# Altium PCB PCB1.PcbDoc
Units mm, origin at the board's own origin, x right, y up, seen from the top; angles counter-clockwise.
Board outline 85.72 x 69.59 mm, 2 copper layers (Top Layer, Bottom Layer); 30 components, 32 nets, 149 pads, 28 vias.
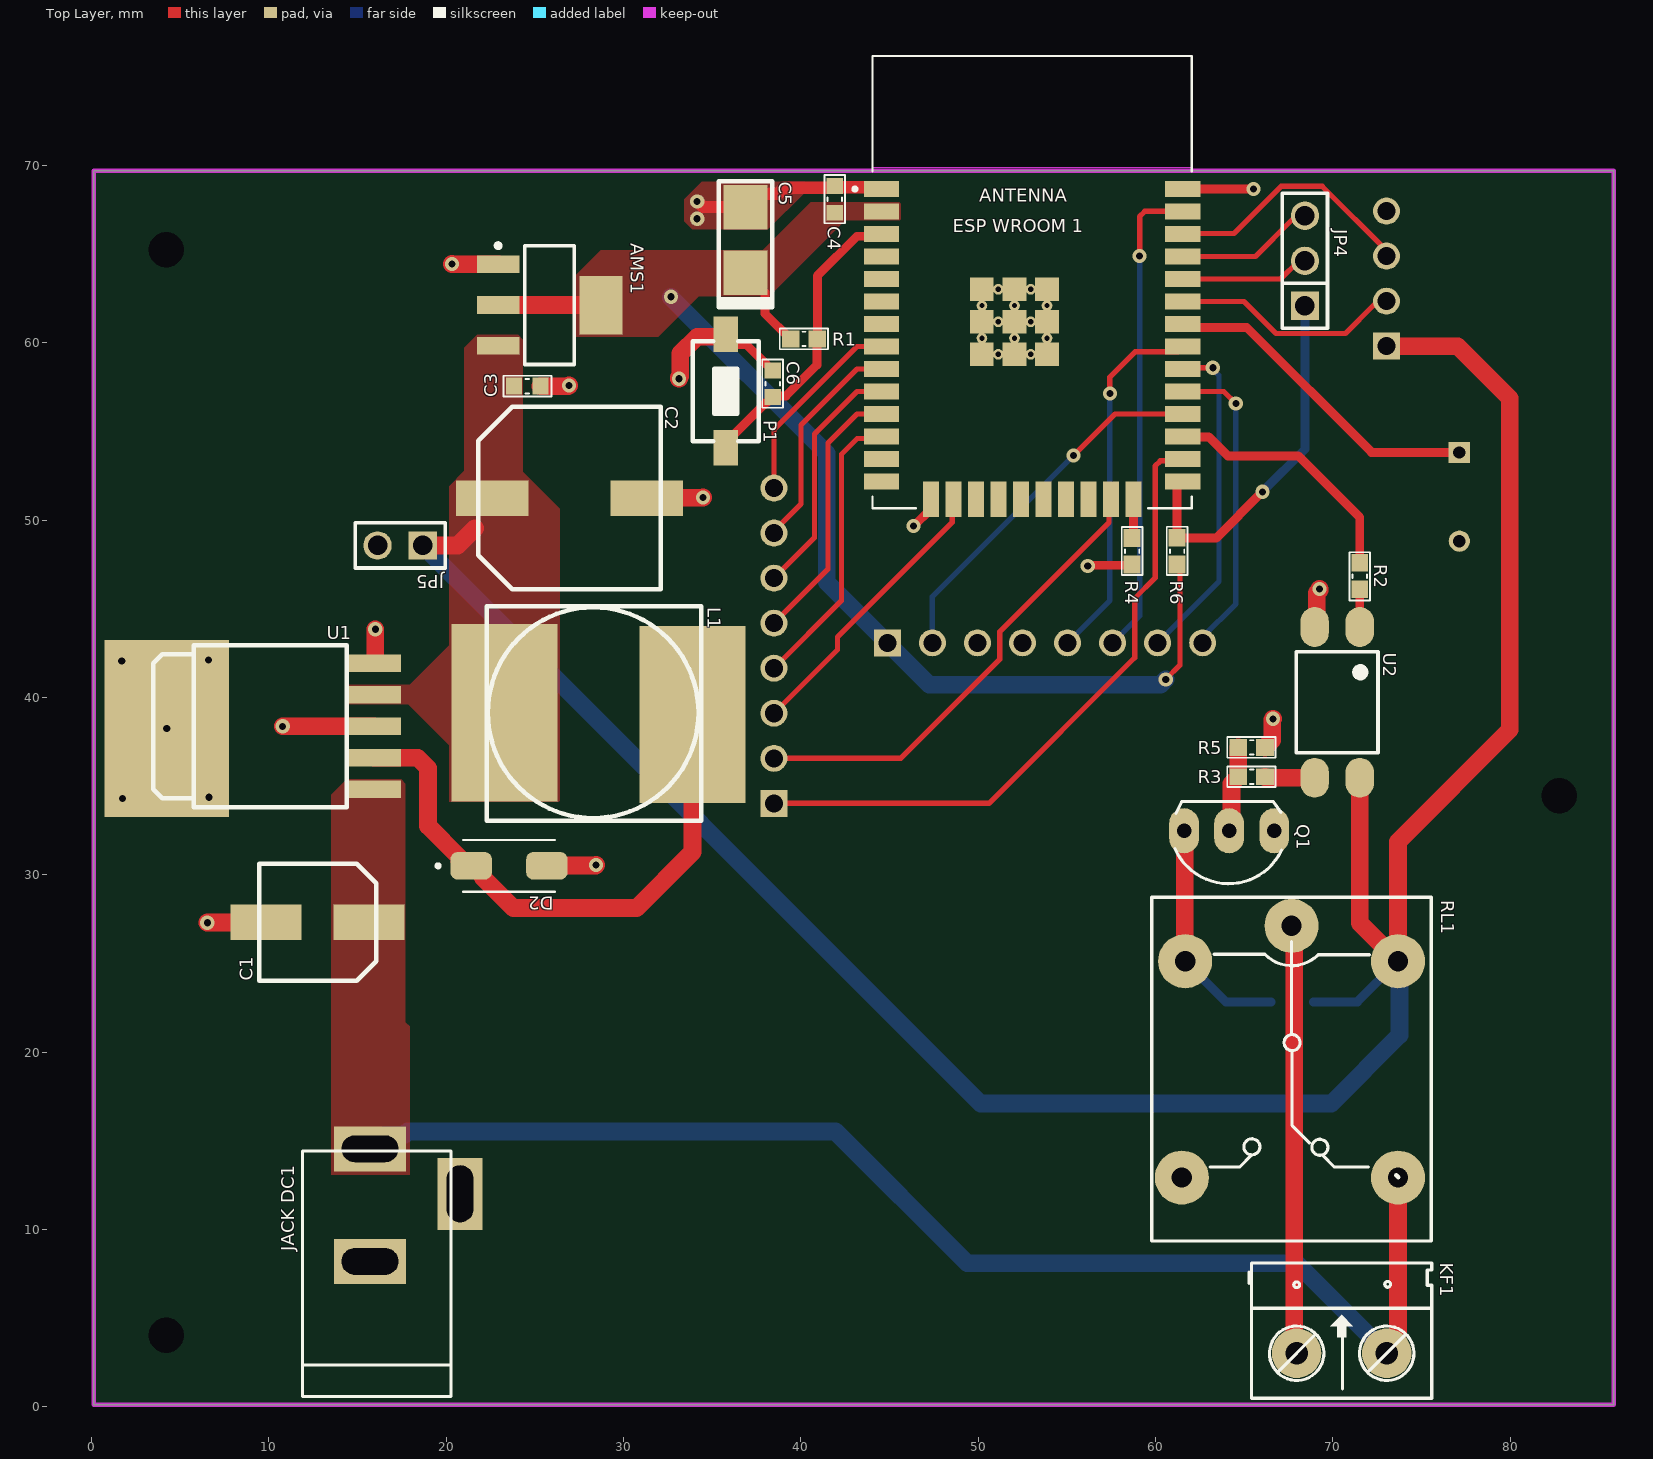
[diagram p0: Top Layer view]
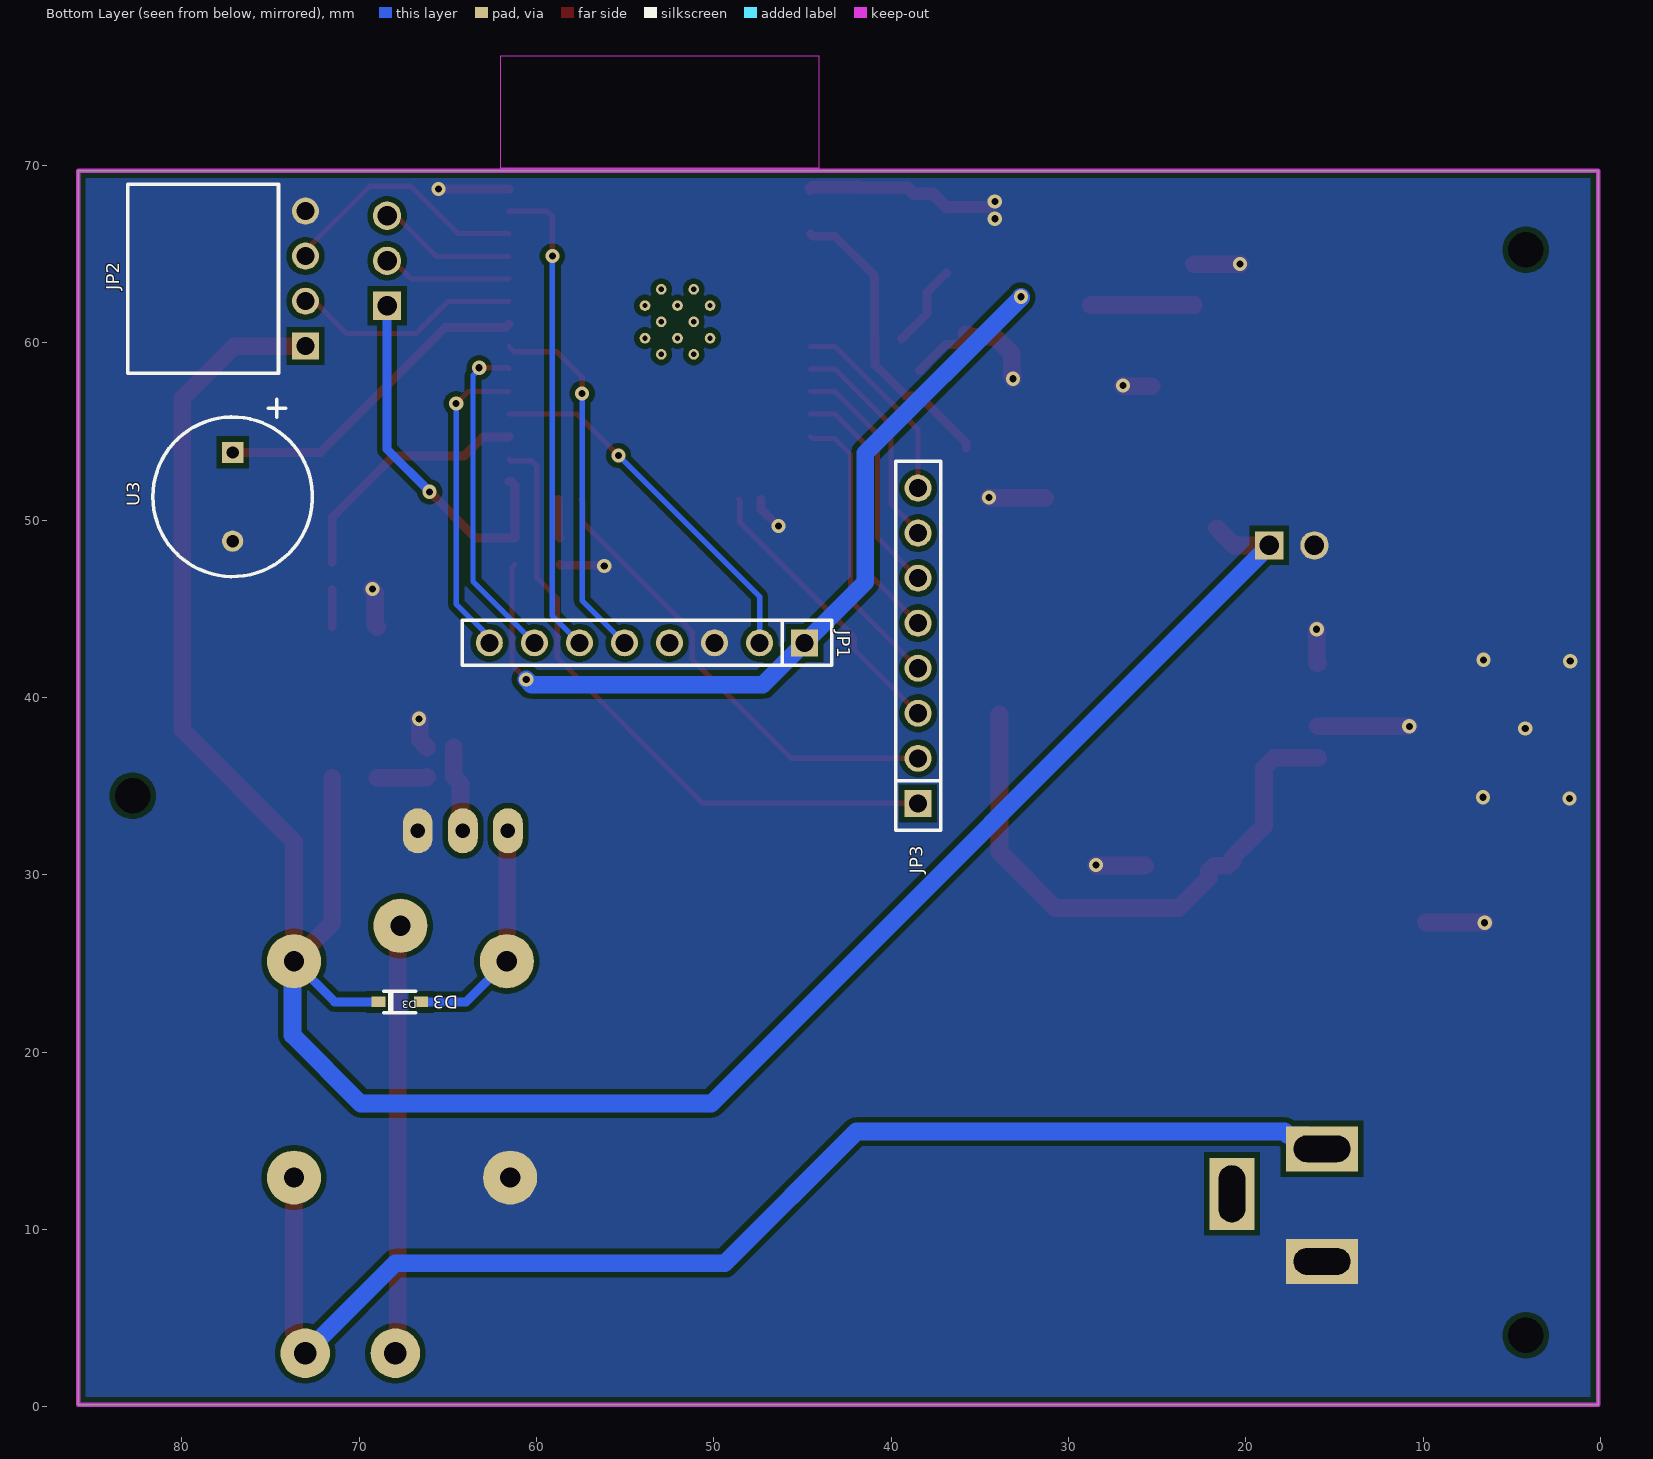
[diagram p1: Bottom Layer view, seen from below]
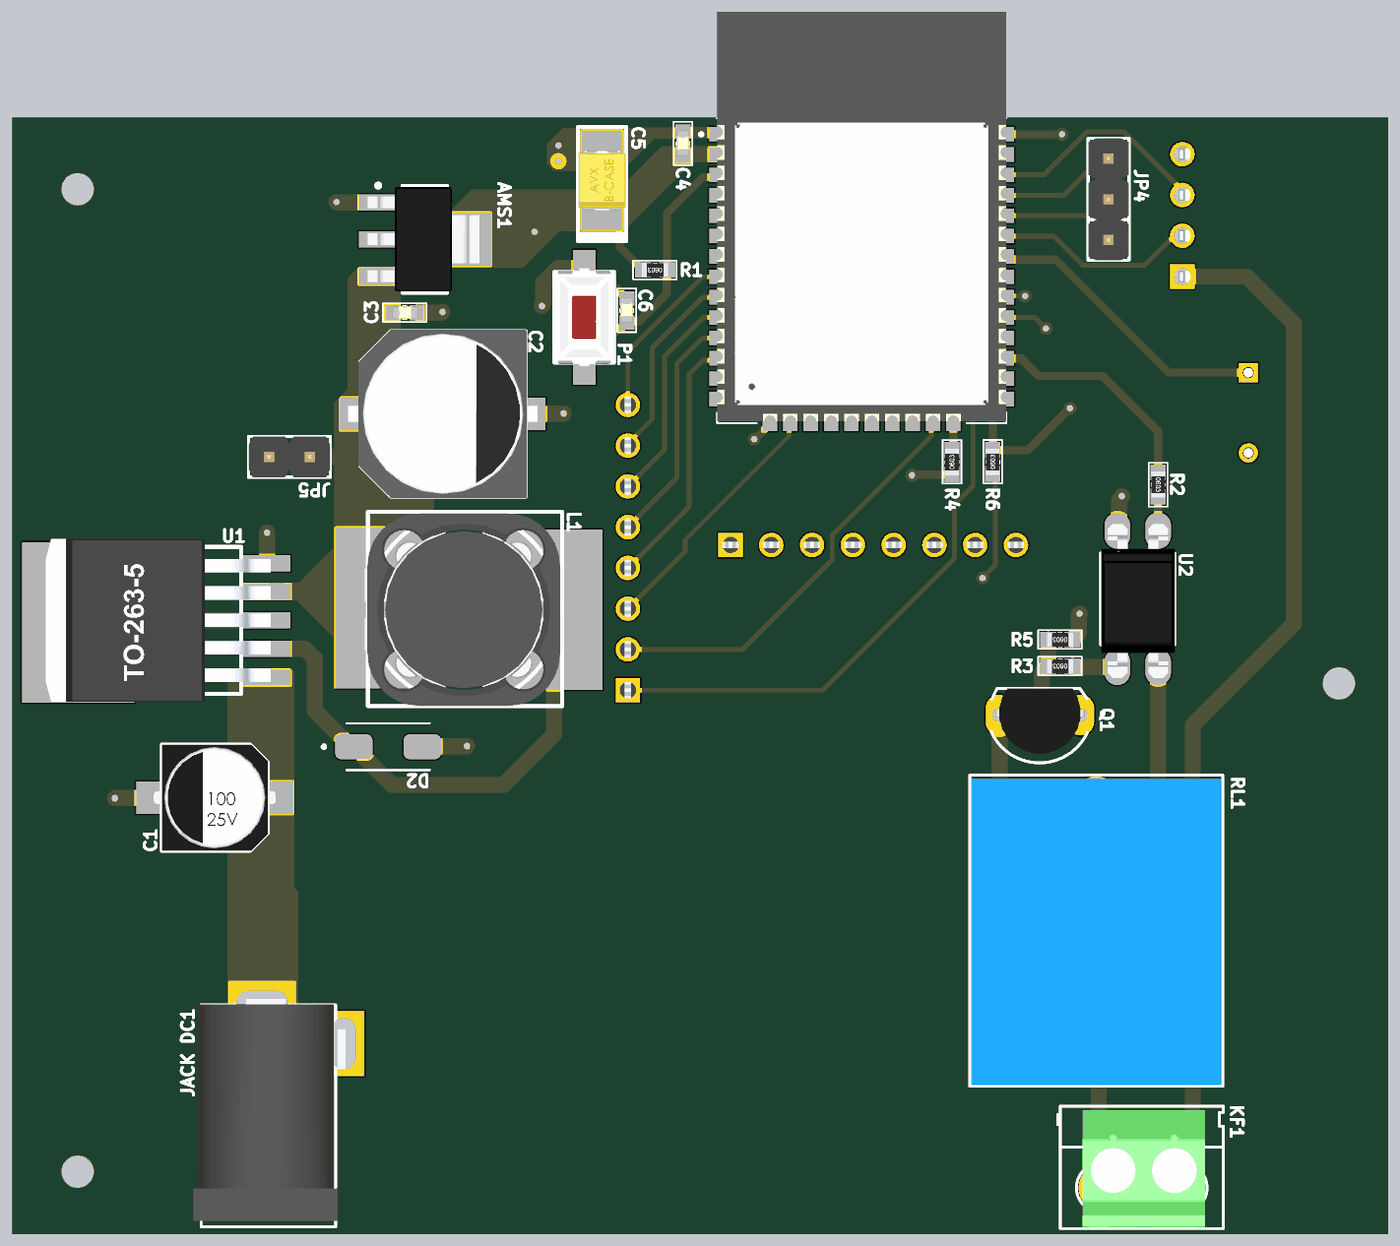
[diagram p2: 3D render of the assembled board from above, using the file's embedded part models]
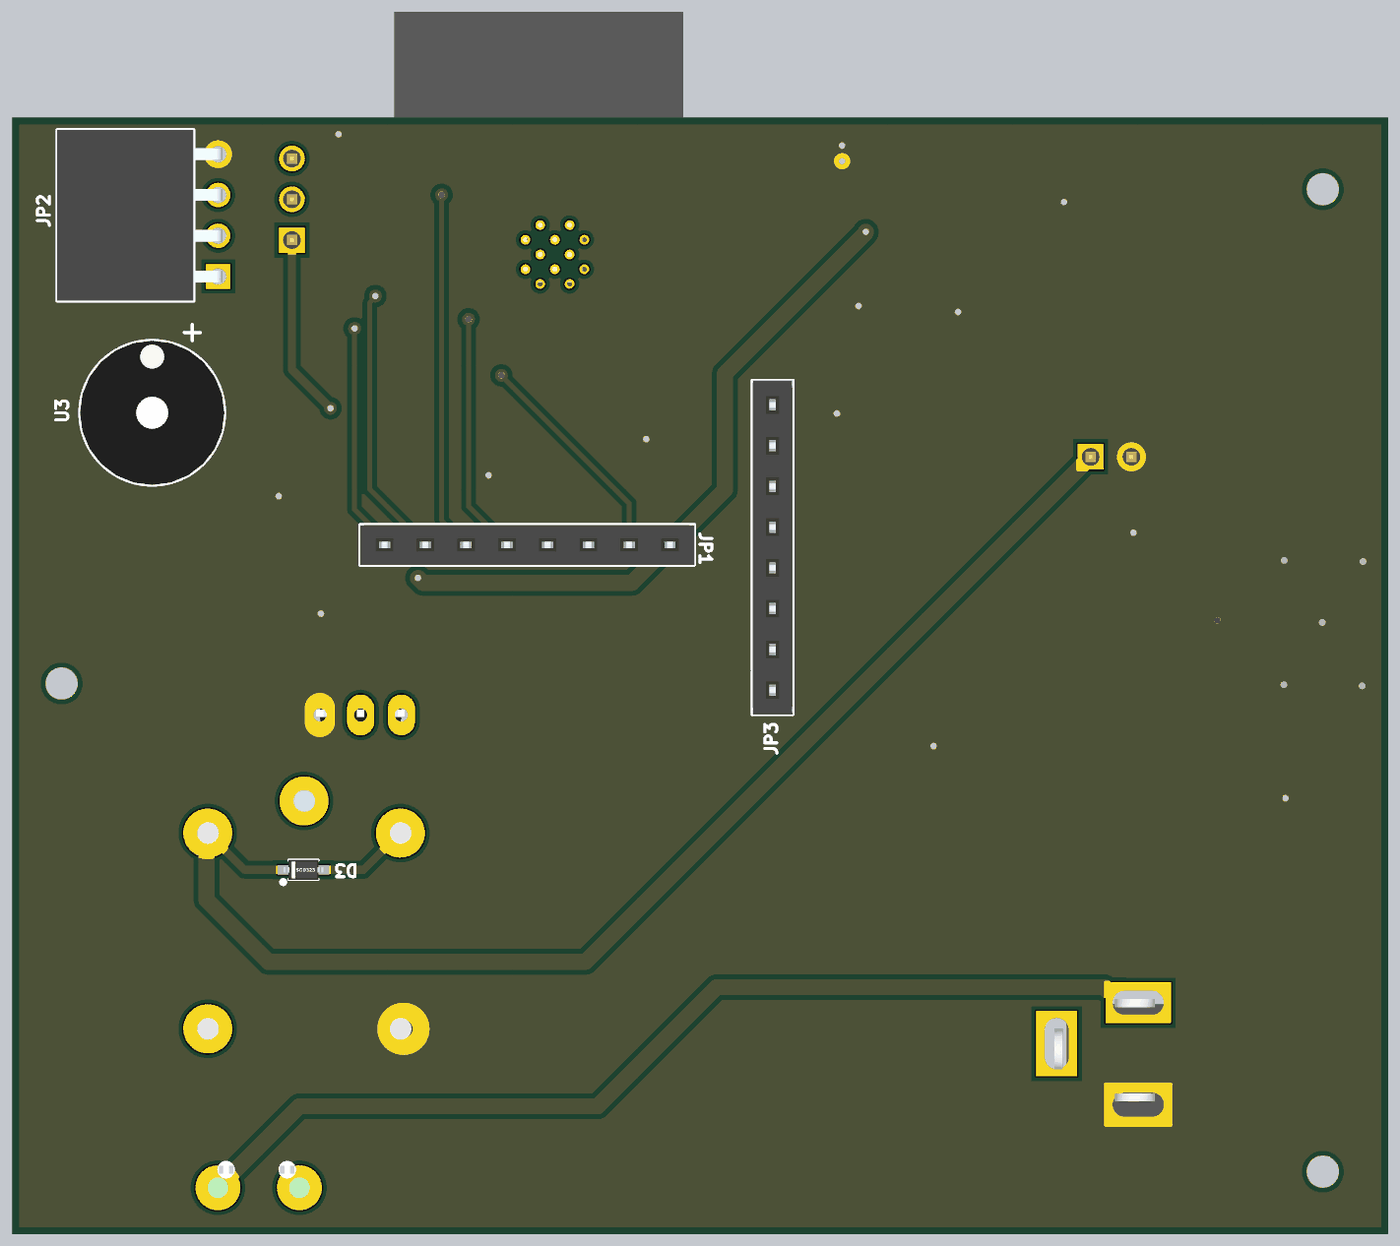
[diagram p3: 3D render of the assembled board from below, using the file's embedded part models]

## Layer stack, top to bottom
Top Solder: solder mask 0.0102, Solder Resist, Dk 3.5
Top Layer: signal copper 0.0356
Dielectric 1: dielectric 0.32, FR-4, Dk 4.8
Bottom Layer: signal copper 0.0356
Bottom Solder: solder mask 0.0102, Solder Resist, Dk 3.5

## Board outline
0.127,0.127 0.127,69.721 33.528,69.721 85.852,69.721 85.852,0.127

## Design rules (kind name [scope] priority, off if disabled: settings)
Clearance [All] p1: gap=0.3 ignorepadtopadclearanceinfootprint=FALSE
HoleSize [All] p1: absolutevalues=TRUE maxlimit=5 minlimit=0.3 maxpercent=80.000 minpercent=20.000
HoleToHoleClearance [All] p1: gap=0.15 allowstackedmicrovias=TRUE
MinimumSolderMaskSliver [All] p1: minsoldermaskwidth=0.1
PolygonConnect [All] p1: connectstyle=Direct reliefconductorwidth=0.254 reliefentries=4 polygonreliefangle="90 Angle" airgapwidth=0.254
RoutingVias [All] p1: holewidth=0.4 width=0.8 viastyle="Through Hole" minholewidth=0.3 minwidth=0.6 maxholewidth=0.6 maxwidth=1
SilkToSilkClearance [All] p1: silktosilkclearance=0
SilkToSolderMaskClearance [IsPad] p1: minsilkscreentomaskgap=0 clearancetoexposedcopper=TRUE
SolderMaskExpansion [All] p1: expansion=0.102 istentingtop=FALSE
UnRoutedNet [All] p1: checkbadconnections=TRUE
Width [All] p1: maxlimit=1 minlimit=0.3 preferedwidth=0.5
24 further rules are at their usual default settings.

## Components (designator, comment, footprint, x,y, rotation, side; value= is the part's Value field where it differs from the comment)
AMS1 "AMS1117-3.3V" SOT223 25.827,62.133 r270 top value="AMS1117-3.3V SOT223"
C1 "100uF" "tu nhom 6.3 (d)" 12.746,27.335 r180 top
C2 "680uF" "tu nhom 10 (G)" 26.952,51.252 r0 top
C3 "10uF" "Cap 0603" 24.576,57.569 r0 top
C4 "22uF" "Cap 0603" 41.902,68.102 r90 top
C5 "100uF" "tu tantalum smd3528" 36.877,65.802 r90 top
C6 "100uF" "Cap 0603" 38.402,57.702 r90 top
D2 "B340A-13-F" DIOM5226X240N 23.541,30.51 r0 top
D3 "1N4148" SOD-323 67.705,22.836 r0 bottom
"ESP WROOM 1" "ESP32 WROOM 32" ESP32-WROOM-32D 53.046,63.427 r0 top
"JACK DC1" "JACK DC 5.5" "JACK DC 5.5" 18.242,11.377 r90 top value="Jac DC"
JP1 "JP 1x8 2.54" "JP 1x8 CT" 44.877,43.083 r0 bottom
JP2 "JP 1x4 2.54" "JP 1x4 CC" 73.025,63.625 r90 bottom
JP3 "JP 1x8 2.54" "JP 1x8 CT" 38.481,34.034 r90 bottom
JP4 "JP 1x3 2.54" "JP 1x3 DT" 68.427,62.087 r90 top
JP5 "JP 1x2 2.54" "JP 1x2 DT" 18.667,48.577 r180 top
KF1 "CON 2 KF301" "Con 2 KF301 5.08" 67.959,3.024 r0 top
L1 "150uH - 3A SMD" "Cuon Cam 12x12x10" 22.287,45.146 r270 top
P1 "=value" "SW 2P SMD" 35.814,57.275 r270 top
Q1 "2N3904" TO92 64.149,32.488 r180 top value=C9014
R1 "1k" "tro smd 0603" 40.178,60.228 r180 top
R2 "1k" "tro smd 0603" 71.515,46.851 r270 top
R3 "1k" "tro smd 0603" 65.419,35.536 r180 top
R4 "10k" "tro smd 0603" 58.677,48.252 r90 top
R5 "10k" "tro smd 0603" 65.419,37.187 r180 top
R6 "10k" "tro smd 0603" 61.214,48.258 r90 top
RL1 "Relay" "Relay 5 Chan SRD" 67.674,27.13 r270 top
U1 "LM2576HVS 5.0V SMD" TO263-5 10.079,38.384 r90 top
U2 "OPTO PC817 SMD" SOP4 70.245,39.727 r270 top value=PC817
U3 "BUZZ" BUZZER_D9_TH 77.135,50.322 r270 bottom

## Footprints (in the part's own frame and the unit in brackets; to place one, negate y for a bottom-side part, rotate by r counter-clockwise, add the part's x,y. Pads: shape width x height; smd on the part's side, far side on the other; paste and mask are expansions set on the pad)
BUZZER_D9_TH [mm]
  rect 1.2x1.2 hole 0.7: 1(-3.5,0)
  round 1.2 hole 0.7: 2(1.5,0)
  silkscreen extent -6.5,-4.5 3.5,4.5, body extent -5.5,-4.5 3.5,4.5, height 5.5
"Cap 0603" [mm]
  rect 0.889x0.95 smd mask+0.076: 1(-0.758,-0.008) 2(0.742,-0.008)
  silkscreen extent -1.35,-0.59 1.36,0.58, body extent -0.77,-0.41 0.83,0.39, height 0.78
"Con 2 KF301 5.08" [mil]
  round 110 hole 50: 1(0,0) 2(200,0)
  silkscreen extent -106,-100 300,200, body extent -45,-97 255,190, height 335
"Cuon Cam 12x12x10" [mm] "Cuon Cam 12x12x10"
  rect 10x6 smd: 1(6.1,11.6) 2(6,1)
  silkscreen extent 0,0 12.1,12.1, body extent 0.1,-0.2 12.1,12.14, height 7.51
DIOM5226X240N [mm]
  rrect50% 2.33x1.55 smd: A(2.135,0) C(-2.135,0)
  silkscreen extent -4.1,-1.46 2.6,1.46
ESP32-WROOM-32D [mm]
  rect 2x0.9 smd: 1(-8.5,5.26) 2(-8.5,3.99) 3(-8.5,2.72) 4(-8.5,1.45) 5(-8.5,0.18) 6(-8.5,-1.09) 7(-8.5,-2.36) 8(-8.5,-3.63) 9(-8.5,-4.9) 10(-8.5,-6.17) 11(-8.5,-7.44) 12(-8.5,-8.71) 13(-8.5,-9.98) 14(-8.5,-11.25) 25(8.5,-11.25) 26(8.5,-9.98) 27(8.5,-8.71) 28(8.5,-7.44) 29(8.5,-6.17) 30(8.5,-4.9) 31(8.5,-3.63) 32(8.5,-2.36) 33(8.5,-1.09) 34(8.5,0.18) 35(8.5,1.45) 36(8.5,2.72) 37(8.5,3.99) 38(8.5,5.26)
  rect 0.9x2 smd: 15(-5.715,-12.25) 16(-4.445,-12.25) 17(-3.175,-12.25) 18(-1.905,-12.25) 19(-0.635,-12.25) 20(0.635,-12.25) 21(1.905,-12.25) 22(3.175,-12.25) 23(4.445,-12.25) 24(5.715,-12.25)
  rect 1.33x1.33 smd: 39(-2.835,-4.075) 39(-2.835,-2.24) 39(-2.835,-0.405) 39(-1,-4.075) 39(-1,-2.24) 39(-1,-0.405) 39(0.835,-4.075) 39(0.835,-2.24) 39(0.835,-0.405)
  round 0.6 hole 0.3: 39(-2.835,-3.157) 39(-2.835,-1.322) 39(-1.917,-4.075) 39(-1.917,-2.24) 39(-1.917,-0.405) 39(-1,-3.157) 39(-1,-1.322) 39(-0.082,-4.075) 39(-0.082,-2.24) 39(-0.082,-0.405) 39(0.835,-3.157) 39(0.835,-1.322)
  Keep-Out Layer region: 9,6.45 -9,6.45 -9,12.75 9,12.75
  Keep-Out Layer region: 9,6.45 -9,6.45 -9,12.75 9,12.75
  silkscreen extent -10.1,-12.75 9,12.75, body extent -9,-12.62 9,12.88, height 3.2
"JACK DC 5.5" [mm] "Jac DC input"
  rect 2.54x4.064 hole 1.5 slot 3.2 at 90 deg: 1(3.175,2.54) 2(-3.175,2.54)
  rect 4.064x2.54 hole 1.5 slot 3.2 at 0 deg: 3(0.635,-2.54)
  silkscreen extent -10.79,-2.03 3.05,6.35, body extent -10.42,-2.67 3.4,6.84, height 11.02
"JP 1x2 DT" [mm] "2 pins, 1 row, straight, gold plating"
  rect 1.6x1.6 hole 1.1: 1(0,0)
  round 1.6 hole 1.1: 2(2.54,0)
  silkscreen extent -1.27,-1.27 3.81,1.27, body extent -1.27,-1.27 3.81,1.27, height 8.54
"JP 1x3 DT" [mm]
  rect 1.6x1.6 hole 1.1: 1(0,0)
  round 1.6 hole 1.1: 2(2.54,0) 3(5.08,0)
  silkscreen extent -1.27,-1.27 6.35,1.27, body extent -1.27,-1.27 6.35,1.27, height 8.54
"JP 1x4 CC" [mm]
  rect 1.52x1.52 hole 1.02: 1(-3.81,0)
  round 1.52 hole 1.02: 2(-1.27,0) 3(1.27,0) 4(3.81,0)
  silkscreen extent -5.33,1.52 5.33,10.03, body extent -5.33,-0.25 5.33,10.05, height 2.51
"JP 1x8 CT" [mm] "8 row, straight, gold plating"
  rect 1.52x1.52 hole 1.02: 1(0,0)
  round 1.52 hole 1.02: 2(2.54,0) 3(5.08,0) 4(7.62,0) 5(10.16,0) 6(12.7,0) 7(15.24,0) 8(17.78,0)
  silkscreen extent -1.52,-1.27 19.3,1.27, body extent -1.52,-1.25 19.3,1.25, height 8.51
"Relay 5 Chan SRD" [mil] "Relay SPDT, 5 pin, 10A,W 650mil, L 800mil, H 800mil"
  round 120 hole 45: 1(0,0) 2(559.06,236.22) 3(559.06,-243.78) 4(78.74,-236.22) 5(78.74,236.22)
  silkscreen extent -63,-311 700,310, body extent -55,-306 697,304, height 602
SOD-323 [mm] "diode"
  rect 0.8x0.6 smd: 1(-1.2,0) 2(1.2,0)
  round 0.5 on Bottom Overlay: 2(1.27,0.762)
  silkscreen extent -0.9,-0.6 0.9,0.6, body extent -1.25,-0.63 1.25,0.62, height 0.99
SOP4 [mm]
  oval 2.25x1.6 smd: 1(-4.25,1.27) 2(-4.25,-1.27) 3(4.25,-1.27) 4(4.25,1.27)
  silkscreen extent -2.85,-2.3 2.85,2.3, body extent -4.67,-2.29 4.93,2.31, height 3.6
SOT223 [mm]
  rect 1x2.4 smd: 1(-2.3,-2.9) 2(0,-2.9) 3(2.3,-2.9)
  rect 3.3x2.4 smd: 4(0,2.9)
  silkscreen extent -3.47,-3.02 3.35,1.4, body extent -3.25,-3.56 3.25,3.4, height 1.68
"SW 2P SMD" [mm]
  rect 2x1.4 smd: 1(-3.2,-0.051) 2(3.2,-0.051)
  silkscreen extent -2.82,-1.91 2.82,1.8, body extent -3.05,-1.9 3.05,1.8, height 2.5
TO92 [mil] "TO-92"
  oval 66x100 hole 32: 1(-100,0) 2(0,0) 3(100,0)
  silkscreen extent -117,-65 120,118, body extent -109,-66 109,95, height 245
TO263-5 [mil] "TO263-5"
  rect 39.37x120 smd: 1(-140,-230) 2(-70,-230) 3(0,-230) 4(70,-230) 5(140,-230)
  rect 393.7x275.59 smd: 6(-5,230)
  silkscreen extent -180,-170 180,260, body extent -200,-242 200,310, height 180
"tro smd 0603" [mm] "Chip Capacitor, 2-Leads, Body 1,60x0,80mm, IPC Medium Density"
  rect 1x0.95 smd mask+0.076: 1(-0.75,0) 2(0.75,0)
  silkscreen extent -1.35,-0.58 1.37,0.58, body extent -0.82,-0.42 0.82,0.43, height 0.44
"tu nhom 6.3 (d)" [mm]
  rect 4x2 smd: 1(-2.9,0) 2(2.9,0)
  silkscreen extent -3.3,-3.3 3.3,3.3, body extent -3.8,-3.3 3.8,3.3, height 8
"tu nhom 10 (G)" [mm]
  rect 4.1x2 smd: 1(-4.35,0) 2(4.35,0)
  silkscreen extent -5.15,-5.15 5.15,5.15, body extent -5.9,-5.25 5.9,5.25, height 10.5
"tu tantalum smd3528" [mm]
  rect 2.5x2.5 smd: 1(-1.85,0) 2(1.85,0)
  silkscreen extent -3.78,-1.5 3.33,1.5, body extent -1.85,-1.46 1.85,1.47, height 2.03

## Part data
AMS1: library part "AMS1117 SMD", "Dán", Chung_Loai=Dán, Don_Vi=Con, Ma_Hang=MH000596
C1: library part "Tu Nhom 100uF 25V", "Dán", Chung_Loai=Dán, Don_Vi=Con, Ma_Hang=MH002222, So_Chan=2, Ten_Linh_Kien="Tụ Nhôm 100uF 25V 6x7MM"
C2: library part "Tu Nhom 680uF 16V", "Dán", Chung_Loai=Dán, Don_Vi=Con, Ma_Hang=MH007513, So_Chan=2, Ten_Linh_Kien="Tụ Nhôm 680uF 16V 10x10.5MM"
C3 C4 C6: library part "Cap 0603", "Capacitor SMD 0603"
C5: library part "Tu tantalum 100uF 6.3V SMD3528", "Dán", Chung_Loai=Dán, Don_Vi=Con, Ma_Hang=MH007595, So_Chan=2, Ten_Linh_Kien="Tụ tantalum 107J-100uF 6.3V SMD3528"
D2: "Diode Schottky 40V 3A Surface Mount SMA", Package="DO-214 Diodes Inc.", Availability=Unavailable, MF="Diodes Inc.", MP=B340A-13-F, Price=None, SnapEDA_Link=https://www.snapeda.com/parts/B340A-13-F/Diodes%20Inc./view-part/78704/?ref=snap
D3: library part "DIODE GEN PURP 75V 150MA DO35", "DIODE GEN PURP 75V 150MA DO35"
JP1 JP3: library part "JP 1x8 2.54 Cai Thang", "Cắm", Chung_Loai=Cắm, Don_Vi=Con, Ma_Hang=MH004006, Ten_Linh_Kien="Jump Đơn Cái 2.54MM 1x20P Thẳng"
JP2: library part "JP 1x4 2.54 Cai Cong", "Cắm", Chung_Loai=Cắm, Don_Vi=Con, Ma_Hang=MH001265, Ten_Linh_Kien="Jump Đơn Cái 2.54MM 1x40P Cong"
JP4: library part "JP 1x3 2.54 Duc Thang", "Cắm", Chung_Loai=Cắm, Don_Vi=Con, Ma_Hang=MH000903, Ten_Linh_Kien="Jump Đơn Đực 2.54MM 1x40P Thẳng 11MM"
JP5: library part "JP 1x2 2.54 Duc Thang", "Cắm", Chung_Loai=Cắm, Don_Vi=Con, Ma_Hang=MH000903, Ten_Linh_Kien="Jump Đơn Đực 2.54MM 1x40P Thẳng 11MM"
KF1: "Cắm", Chung_Loai=Cắm, Don_Vi=Con, Ma_Hang=MH000987, Ten_Linh_Kien="CON 2 KF301-2P 5.08MM Xanh Dương"
L1: library part "CUON CAM 100uH SMD", "Dán", Chung_Loai=Dán, Don_Vi=Con, Ten_Linh_Kien="Cuộn Cảm 100uH 7x7x4MM CD74"
P1: library part "Button 2 SMD", "SMD Mini Push Button Switch 2 Pin 3x6x2.7mm", MPN="SMD Mini Push Button 2 SMD", Link=https://ram-e-shop.com/product/press2pin-smd/
Q1: library part "Trans 2N3904", "NPN transistor EBC"
R1 R2 R3: library part "Tro 0603 1% 1k", "Dán", Chung_Loai=Dán, Don_Vi=Con, Ma_Hang=MH006334, So_Chan=2, Ten_Linh_Kien="Trở 0603 1% 1k"
R4 R5 R6: library part "Tro 0603 1% 10k", "Dán", Chung_Loai=Dán, Don_Vi=Con, Ma_Hang=MH006333, So_Chan=2, Ten_Linh_Kien="Trở 0603 1% 10k"
RL1: library part "Relay 5 Chan SRD", "Relay 5 Chan", Ma_Hang=MH009374, Ten="Relay 5V10A SRD-05VDC-SL-C Chính Hãng"
U1: "Dán", Chung_Loai=Dán, Don_Vi=Con, Ma_Hang=MH002362, Ten_Linh_Kien="LM2576HVS-5.0V BUCK 5V 3A TO263-5"
U2: "Single Opto"
U3: library part Speaker, "Loudspeaker"

## Free pads (board coordinates)
  round 1.524 hole 2: 2(82.777,34.452) 3(4.202,65.252) 4(4.202,4.027)

## Via types
v1: diameter 0.8, hole 0.4, Top Layer to Bottom Layer, tented both sides, 27 vias
v2: diameter 0.8, hole 0.4, Top Layer to Bottom Layer, 1 vias

## Nets (pads, with @x,y where several pads share a name; then routed paths per layer and width w, separated by ;. In a path a pad name is that pad's centre, name@x,y a point inside that pad or via, vN(x,y) a via of type N, cw(c..) or ccw(c..) an arc to the next point about the centre after c; other vN are vias at no path point)
+3.3V: "ESP WROOM 1.2" AMS1.2 AMS1.4 C4.1 C5.1 JP1.1 R1.2 R6.1 | length 58.8
  Top Layer w0.3: v1(60.577,41.027) 60.577,41.03 61.377,41.83 61.377,47.345 R6.1
  Top Layer w0.5: C5.1 37.977,62.852 37.977,61.654 39.403,60.228 R1.2
  Top Layer w1: AMS1.2 AMS1.4
  Bottom Layer w1: v1(32.677,62.602) 32.677,62.552 41.452,53.777 41.452,46.508 JP1.1 47.233,40.727 60.277,40.727 v1(60.577,41.027)
+5V: AMS1.3 C2.1 C3.1 D3.2@68.905,22.836 JP2.1 JP5.1 L1.2 RL1.5 U1.4 U2.4 | length 136.8
  Top Layer w1: JP5.1 20.652,48.577 21.627,49.552 ; U2.4 71.515,27.289 RL1.5 73.674,31.874 79.977,38.177 79.977,56.877 77.039,59.815 JP2.1
  Bottom Layer w0.5: D3.2@68.905,22.836 71.38,22.836 RL1.5
  Bottom Layer w1: JP5.1 50.142,17.102 69.902,17.102 73.752,20.952 73.752,25.052 RL1.5
+12V: "JACK DC1.1" C1.1 KF1.2 RL1.2 U1.1 | length 73.1
  Top Layer w1: KF1.2 73.039,3.509 73.674,4.144 RL1.2
  Bottom Layer w1: 15.702,14.552 16.472,15.322 17.615,15.322 17.82,15.527 41.952,15.527 49.377,8.102 67.961,8.102 KF1.2
BUZZER: "ESP WROOM 1.32" U3.1 | length 18.6
  Top Layer w0.5: 61.546,61.067 61.746,60.867 65.137,60.867 72.182,53.822 U3.1
COL1: "ESP WROOM 1.12" JP3.4 | length 16.3
  Top Layer w0.3: JP3.4 42.291,45.464 42.291,53.719 43.18,54.608 44.437,54.608 44.546,54.717
COL2: "ESP WROOM 1.16" JP3.3 | length 16.3
  Top Layer w0.3: JP3.3 42.062,42.695 42.062,43.412 48.528,49.878 48.528,51.104 48.601,51.177
COL3: "ESP WROOM 1.23" JP3.2 | length 26.7
  Top Layer w0.3: JP3.2 45.624,36.574 50.852,41.802 51.207,42.157 51.207,43.707 57.378,49.878 57.378,51.064 57.491,51.177
COL4: "ESP WROOM 1.26" JP3.1 | length 36.8
  Top Layer w0.3: JP3.1 50.608,34.034 58.827,42.253 58.827,45.602 59.977,46.752 59.977,53.052 60.271,53.346 61.445,53.346 61.546,53.447
EN: "ESP WROOM 1.3" C6.1 P1.2 R1.1 | length 16.9
  Top Layer w0.5: P1.2 35.763,54.375 38.038,56.65 38.116,56.65 38.475,57.009 39.159,57.009 40.902,58.752 40.902,60.202 R1.1 40.928,63.778 43.166,66.016 44.415,66.016 44.546,66.147
GND: "ESP WROOM 1.1" "ESP WROOM 1.15" "ESP WROOM 1.38" "JACK DC1.2" AMS1.1 C1.2 C2.2 C3.2 C4.2 C5.2 C6.2 D2.A JP1.3 JP2.4 JP5.2 P1.1 Q1.1 R4.1 R5.1 RL1.3 U1.3 U1.5 U1.6 U2.2 U3.2 | length 52.3
  Top Layer w0.5: P1.1 35.763,60.359 36.213,59.909 36.92,59.909 38.185,58.644 38.185,58.639 38.38,58.444 C6.2 ; v1(46.352,49.677) 46.381,49.677 47.331,50.627 47.331,51.177 ; v1(56.177,47.427) 56.214,47.465 58.639,47.465 R4.1 ; 61.546,68.687 61.551,68.682 65.522,68.682 v1(65.527,68.677)
  Top Layer w0.7: v1(34.152,67.977) 34.179,67.977 34.492,67.665 36.865,67.665 C5.2 37.63,68.405 38.709,68.405 39.056,68.752 41.818,68.752 C4.2 41.978,68.777 44.456,68.777 44.546,68.687
  Top Layer w1: v1(6.527,27.302) 6.543,27.319 9.829,27.319 C1.2 ; v1(10.777,38.377) 10.784,38.384 U1.3 ; U1.5 16.002,41.94 v1(16.002,43.852) ; v1(20.327,64.452) 20.346,64.433 AMS1.1 ; C3.2 26.886,57.561 v1(26.927,57.602) ; D2.A 25.697,30.531 28.431,30.531 v1(28.452,30.552) ; C2.2 31.314,51.265 34.464,51.265 v1(34.477,51.277) ; v1(33.127,57.977) 33.127,58.05 33.202,58.125 33.202,59.402 34.149,60.349 35.563,60.349 35.689,60.475 P1.1 ; R5.1 66.575,37.594 66.575,38.75 v1(66.627,38.802) ; U2.2 69.089,44.092 69.089,45.891 69.252,46.054 v1(69.252,46.127)
  other v1: 1.752,34.302 6.627,34.377 4.237,38.257 1.702,42.052 6.602,42.127
  other v2: 34.152,67.002
I2C_SCL: "ESP WROOM 1.36" JP2.3 | length 14.4
  Top Layer w0.3: 61.546,66.147 61.564,66.165 64.423,66.165 67.085,68.827 69.402,68.827 73.025,65.204 JP2.3
I2C_SDA: "ESP WROOM 1.33" JP2.2 | length 13
  Top Layer w0.3: 61.546,62.337 64.992,62.337 66.802,60.527 70.702,60.527 72.297,62.122 72.792,62.122 JP2.2
IO0: "ESP WROOM 1.25" JP4.1 R6.2 | length 20.8
  Top Layer w0.5: 61.546,52.177 61.414,52.177 61.214,51.977 R6.2 61.23,48.993 63.418,48.993 v1(66.027,51.602)
  Bottom Layer w0.5: v1(66.027,51.602) 68.427,54.002 JP4.1
LOCK: "ESP WROOM 1.27" R2.1 | length 14.4
  Top Layer w0.5: 61.546,54.717 61.561,54.701 63.003,54.701 64.077,53.627 68.052,53.627 71.515,50.164 R2.1
NetD2_C: D2.C L1.1 U1.2 | length 32.8
  Top Layer w1: U1.2 18.391,36.606 18.977,36.02 18.977,32.752 20.741,30.988 20.741,30.785 21.016,30.51 21.796,30.51 22.071,30.235 22.071,29.845 23.789,28.127 30.727,28.127 33.887,31.287 L1.1
NetD3_1: D3.1 Q1.3 RL1.4 | length 13.2
  Top Layer w1: Q1.3 61.641,32.456 61.641,25.163 RL1.4
  Bottom Layer w0.5: RL1.4 63.968,22.836 D3.1
"NetESP WROOM 1_24": "ESP WROOM 1.24" R4.2 | length 2.2
  Top Layer w0.5: R4.2 58.761,49.086 58.761,51.177
NetKF1_1: KF1.1 RL1.1 | length 24.2
  Top Layer w1: RL1.1 67.816,26.988 67.816,3.167 KF1.1
NetQ1_2: Q1.2 R3.2 R5.2 | length 4.9
  Top Layer w1: Q1.2 64.278,32.617 64.278,35.145 R3.2 R5.2
NetR2_2: R2.2 U2.1 | length 2.1
  Top Layer w0.5: U2.1 R2.2
NetR3_1: R3.1 U2.3 | length 2.8
  Top Layer w1: R3.1 66.228,35.477 U2.3
ROW1: "ESP WROOM 1.8" JP3.8 | length 11.3
  Top Layer w0.3: JP3.8 38.481,55.116 43.162,59.797 44.546,59.797
ROW2: "ESP WROOM 1.9" JP3.7 | length 12.6
  Top Layer w0.3: JP3.7 38.481,49.401 40.005,50.925 40.005,55.37 43.162,58.527 44.546,58.527
ROW3: "ESP WROOM 1.10" JP3.6 | length 13.8
  Top Layer w0.3: JP3.6 40.767,49.02 40.767,54.862 43.162,57.257 44.546,57.257
ROW4: "ESP WROOM 1.11" JP3.5 | length 15.1
  Top Layer w0.3: JP3.5 41.529,47.242 41.529,54.354 43.162,55.987 44.546,55.987
RX0: "ESP WROOM 1.34" JP4.2 | length 7.3
  Top Layer w0.3: 61.546,63.607 67.057,63.607 68.077,64.627 JP4.2
SPI_CLK: "ESP WROOM 1.30" JP1.7 | length 18.8
  Top Layer w0.3: 61.546,58.527 61.617,58.599 v1(63.23,58.599)
  Bottom Layer w0.3: JP1.7 63.577,46.543 63.577,58.173 63.23,58.52 v1(63.23,58.599)
SPI_CS: "ESP WROOM 1.29" JP1.8 | length 17.5
  Top Layer w0.3: 61.546,57.257 63.847,57.257 v1(64.527,56.577)
  Bottom Layer w0.3: JP1.8 62.657,43.407 64.527,45.277 v1(64.527,56.577)
SPI_MISO: "ESP WROOM 1.31" JP1.5 | length 20.8
  Top Layer w0.3: v1(57.427,57.152) 57.427,58.077 58.847,59.497 61.246,59.497 61.546,59.797
  Bottom Layer w0.3: JP1.5 57.427,45.473 v1(57.427,57.152)
SPI_MOSI: "ESP WROOM 1.37" JP1.6 | length 27.2
  Top Layer w0.3: v1(59.102,64.902) 59.102,67.127 59.392,67.417 61.546,67.417
  Bottom Layer w0.3: JP1.6 59.102,44.608 v1(59.102,64.902)
SPI_Reset: "ESP WROOM 1.28" JP1.2 | length 21
  Top Layer w0.3: v1(55.377,53.652) 57.712,55.987 61.546,55.987
  Bottom Layer w0.3: JP1.2 47.417,45.692 v1(55.377,53.652)
TX0: "ESP WROOM 1.35" JP4.3 | length 7.8
  Top Layer w0.3: 61.546,64.877 65.627,64.877 67.668,66.918 68.178,66.918 JP4.3
pads on no net: "ESP WROOM 1.4" "ESP WROOM 1.5" "ESP WROOM 1.6" "ESP WROOM 1.7" "ESP WROOM 1.13" "ESP WROOM 1.14" "ESP WROOM 1.17" "ESP WROOM 1.18" "ESP WROOM 1.19" "ESP WROOM 1.20" "ESP WROOM 1.21" "ESP WROOM 1.22" "ESP WROOM 1.39" "JACK DC1.3" D3.2@68.975,22.074 JP1.4

## Polygon pours and split planes (outlines as drawn)
GND on Top Layer "GND_L01_P005" (solid, pour order 5): 34.402,69.077 33.427,68.102 33.427,66.852 33.877,66.402 38.127,66.402 40.177,68.452 40.177,69.077
+12V on Top Layer "+12V_L01_P003" (solid, pour order 3): 17.952,13.102 13.527,13.102 13.527,34.527 14.402,35.402 17.452,35.402 17.702,35.152 17.702,21.702 17.952,21.452
+5V on Top Layer "+5V_L01_P002" (solid, pour order 2): 14.427,40.727 14.377,40.677 14.377,39.677 14.427,39.627 17.852,39.627 20.252,37.227 20.602,36.877 20.602,43.377 17.952,40.727
+5V on Top Layer "+5V_L01_P001" (solid, pour order 1): 20.177,34.127 26.352,34.127 26.402,34.177 26.402,50.652 24.327,52.727 24.327,60.177 24.052,60.452 21.752,60.452 21.027,59.727 21.027,52.777 20.177,51.927
+3.3V on Top Layer "+3.3V_L01_P000" (solid, pour order 0): 45.552,67.927 45.627,67.852 45.627,66.977 45.577,66.927 42.502,66.927 38.202,62.627 34.227,62.627 31.952,60.352 27.302,60.352 27.302,63.827 28.702,65.227 37.852,65.227 40.552,67.927
GND on Bottom Layer "GND_L02_P004" (solid, remove dead copper, pour order 4): 0.127,69.727 0.127,0.127 85.852,0.127 85.852,0.202 85.852,69.727

## Keep-outs
Keep-Out Layer:
  the board outline again, w0.254

## Text inside footprints (layer, text, board x,y; h text height)
"ESP WROOM 1": Top Overlay "ANTENNA" at 50.052,67.952 h0.75